# Altium PCB PCB1.PcbDoc
Units mm, origin at the board's own origin, x right, y up, seen from the top; angles counter-clockwise.
Board outline 50 x 50 mm, 2 copper layers (Top Layer, Bottom Layer); 7 components, 13 nets, 33 pads, 0 vias.
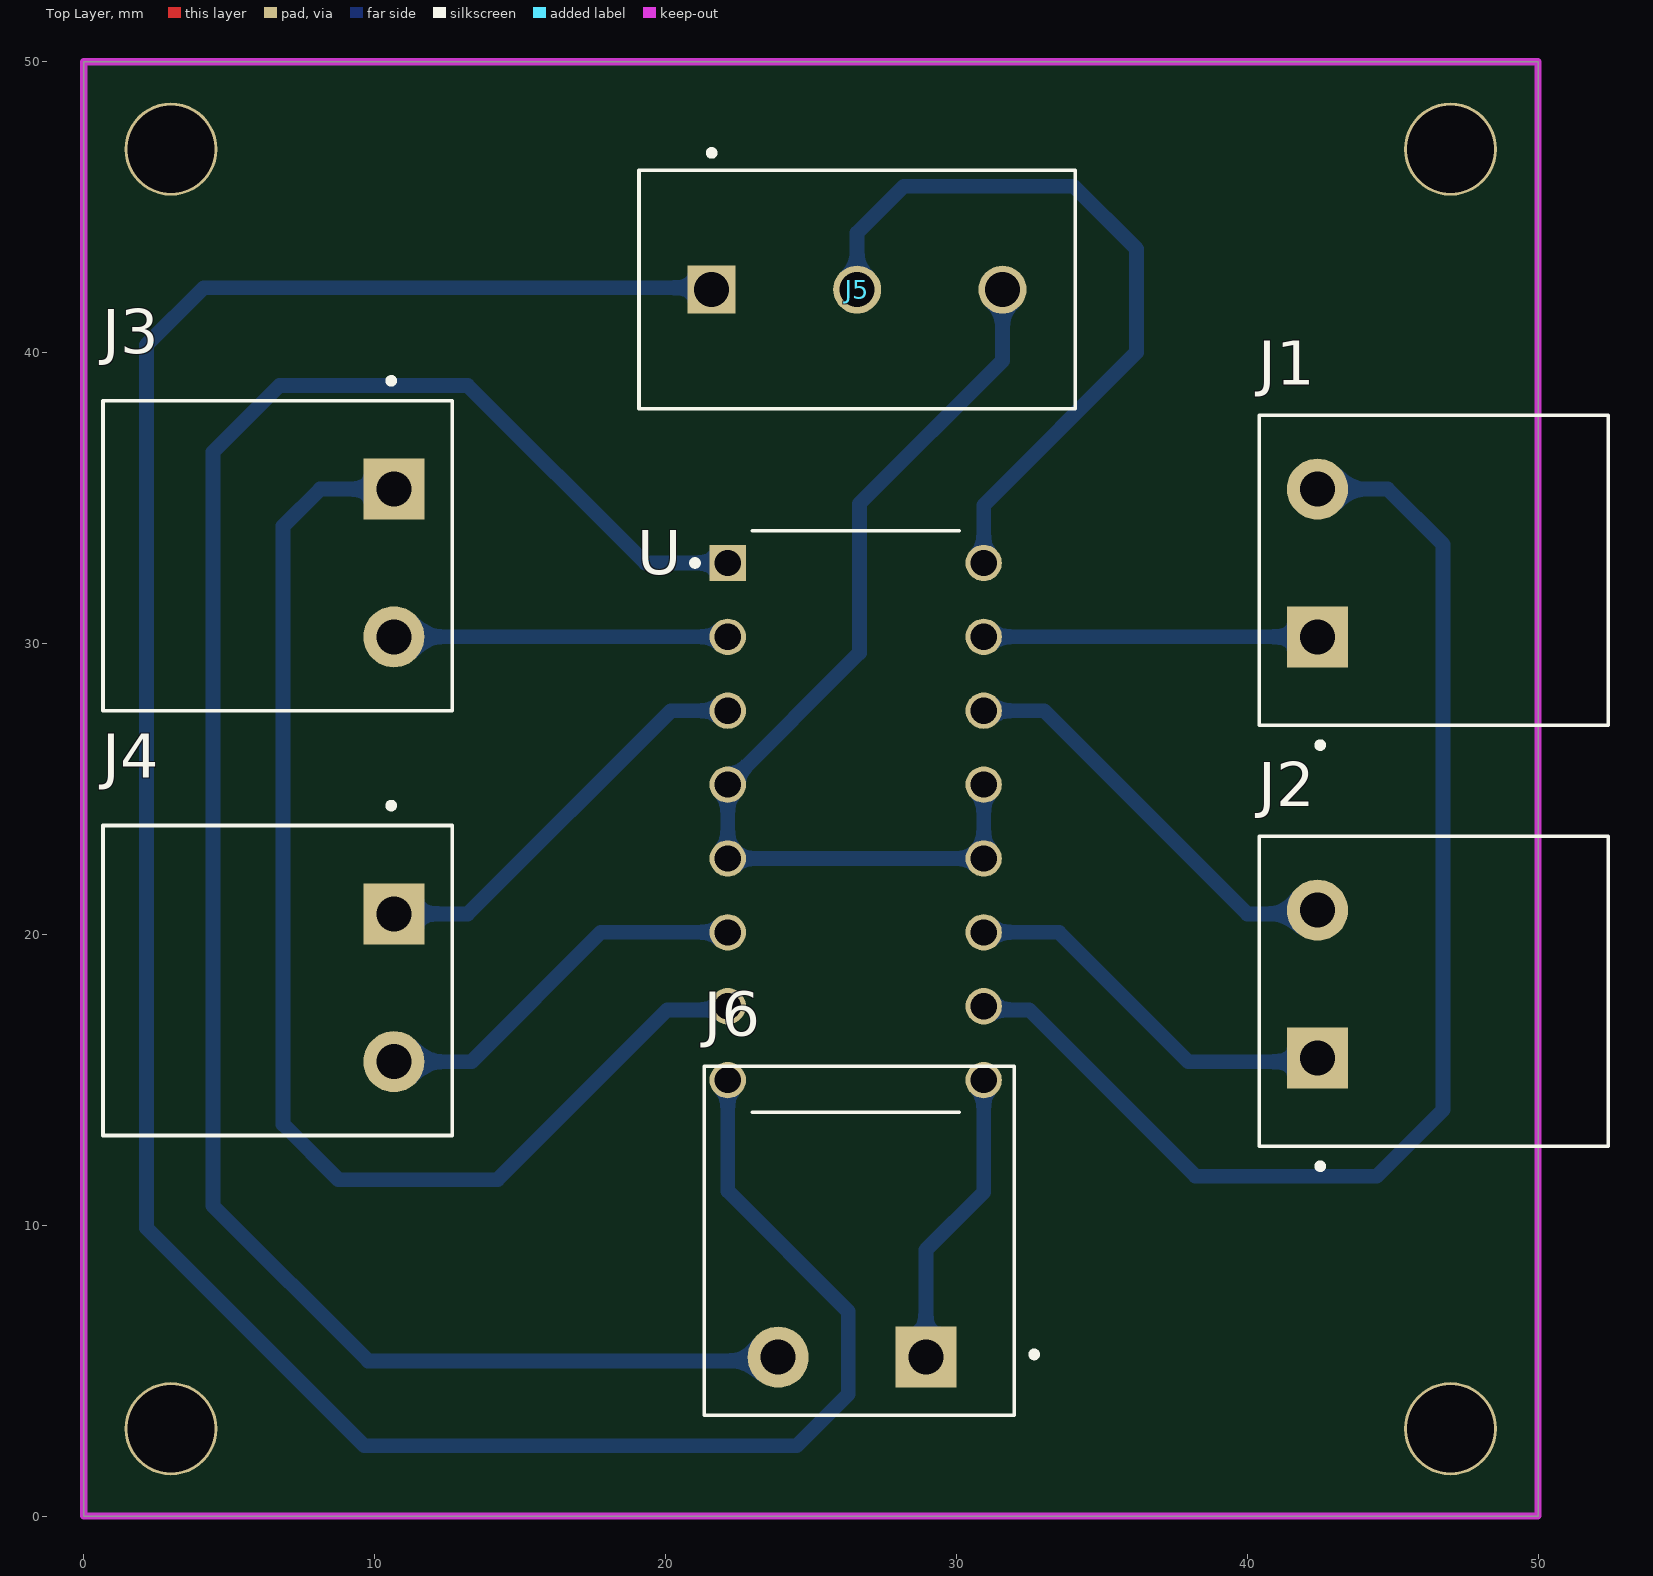
[diagram p0: Top Layer view]
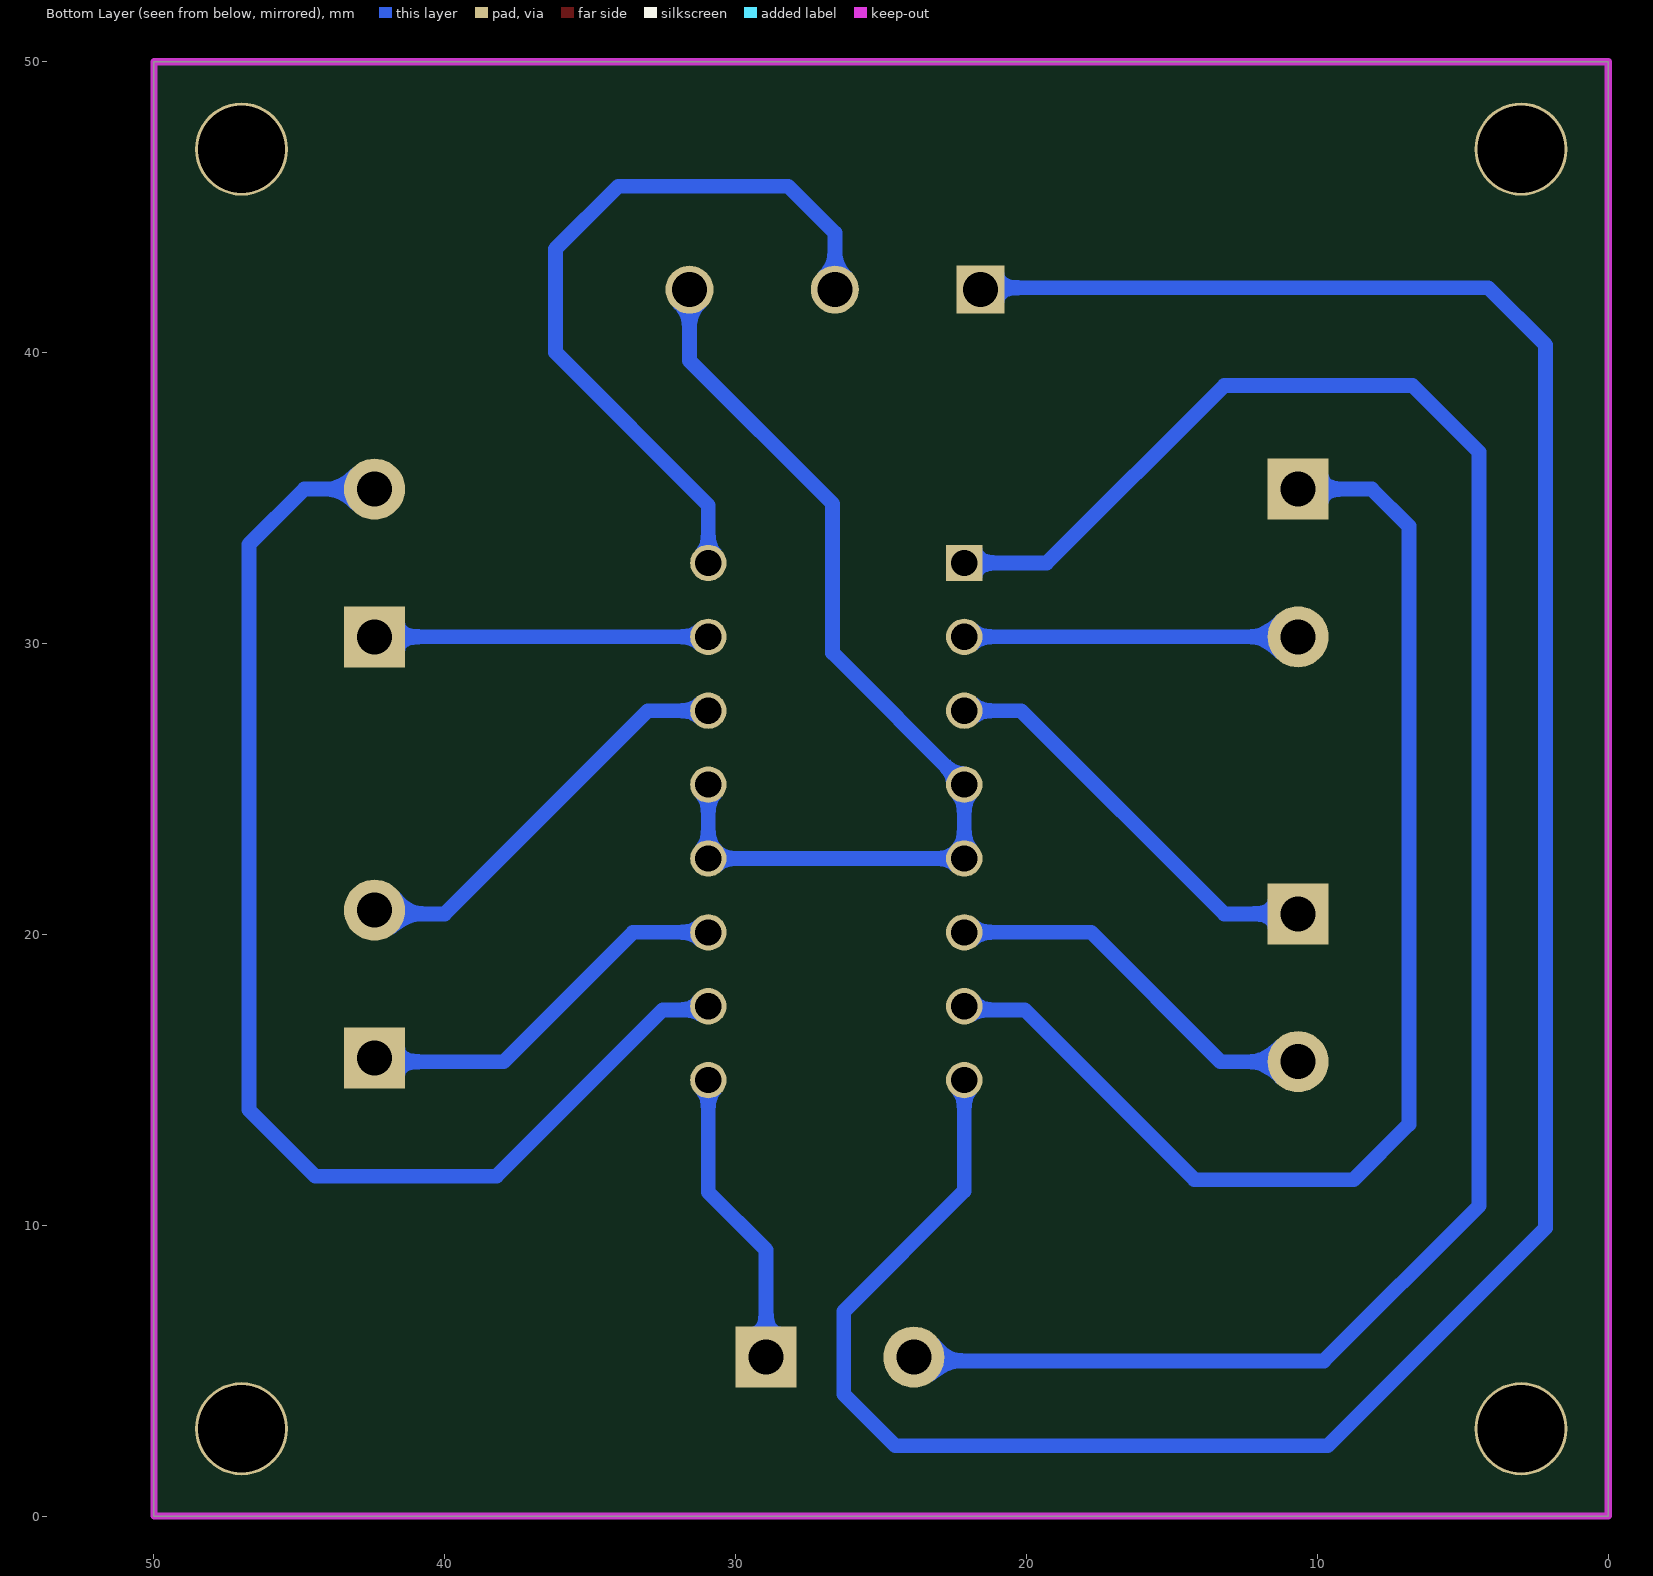
[diagram p1: Bottom Layer view, seen from below]

## Layer stack, top to bottom
Top Solder: solder mask 0.0102, Solder Resist, Dk 3.5
Top Layer: signal copper 0.0356
Dielectric 1: dielectric 0.32, FR-4, Dk 4.8
Bottom Layer: signal copper 0.0356
Bottom Solder: solder mask 0.0102, Solder Resist, Dk 3.5

## Board outline
0,0 0,50 50,50 50,0

## Design rules (kind name [scope] priority, off if disabled: settings)
Clearance [All] p1: gap=0.508 ignorepadtopadclearanceinfootprint=FALSE
HoleSize [All] p1: absolutevalues=TRUE maxlimit=2.54 minlimit=0.406 maxpercent=80.000 minpercent=20.000
HoleToHoleClearance [All] p1: gap=0.508 allowstackedmicrovias=TRUE
MinimumSolderMaskSliver [All] p1: minsoldermaskwidth=0.508
PolygonConnect [All] p1: connectstyle=Relief reliefconductorwidth=0.254 reliefentries=4 polygonreliefangle="90 Angle" airgapwidth=0.254
RoutingVias [All] p1: holewidth=0.711 width=1.524 viastyle="Through Hole" minholewidth=0.711 minwidth=1.524 maxholewidth=0.711 maxwidth=1.524
SilkToSilkClearance [All] p1: silktosilkclearance=0.508
SilkToSolderMaskClearance [IsPad] p1: minsilkscreentomaskgap=0.508 clearancetoexposedcopper=TRUE
SolderMaskExpansion [All] p1: expansion=0.102
Width [All] p1: maxlimit=0.508 minlimit=0.508 preferedwidth=0.508
25 further rules are at their usual default settings.

## Components (designator, comment, footprint, x,y, rotation, side; value= is the part's Value field where it differs from the comment)
J1 "282814-2" TE_282814-2 42.418,32.766 r90 top
J2 "282814-2" TE_282814-2 42.418,18.288 r90 top
J3 "282814-2" TE_282814-2 10.668,32.766 r270 top
J4 "282814-2" TE_282814-2 10.668,18.161 r270 top
J5 "1546216-3" TE_1546216-3 26.59,42.164 r0 top
J6 "282814-2" TE_282814-2 26.416,5.461 r180 top
U "L293D" DIP880W50P254L2000H510Q16 26.543,23.876 r0 top

## Footprints (in the part's own frame and the unit in brackets; to place one, negate y for a bottom-side part, rotate by r counter-clockwise, add the part's x,y. Pads: shape width x height; smd on the part's side, far side on the other; paste and mask are expansions set on the pad)
DIP880W50P254L2000H510Q16 [mm]
  rect 1.25x1.25 hole 0.9: 1(-4.4,8.89)
  round 1.25 hole 0.9: 2(-4.4,6.35) 3(-4.4,3.81) 4(-4.4,1.27) 5(-4.4,-1.27) 6(-4.4,-3.81) 7(-4.4,-6.35) 8(-4.4,-8.89) 9(4.4,-8.89) 10(4.4,-6.35) 11(4.4,-3.81) 12(4.4,-1.27) 13(4.4,1.27) 14(4.4,3.81) 15(4.4,6.35) 16(4.4,8.89)
  silkscreen extent -5.62,-10 3.55,10
TE_282814-2 [mm]
  rect 2.1x2.1 hole 1.2: 1(-2.54,0)
  round 2.1 hole 1.2: 2(2.54,0)
  silkscreen extent -6.36,-10 5.08,2
TE_1546216-3 [mm]
  rect 1.65x1.65 hole 1.2: 1(-5,0)
  round 1.65 hole 1.2: 2(0,0) 3(5,0)
  silkscreen extent -7.5,-4.1 7.5,4.8

## Part data
J1 J2 J3 J4 J6: "TERMINAL BLOCK,HEADER, 5.08 MM, 2WAY; Product Range:-; Gender:Header", Package=None, Availability=Unavailable, EU_RoHS_Compliance=Compliant, MF="TE Connectivity", MP=282814-2, Price=None, SnapEDA_Link=https://www.snapeda.com/parts/282814-2/TE%20Connectivity%20AMP%20Connectors/view-part/2381383/?ref=snap, TE_purchase_URL=https://www.te.com/usa-en/product-282814-2.html?te_bu=Cor&te_type=disp&te_campaign=seda_glo_cor-seda-global-disp-prtnr-fy19-seda-model-bom-cta_sma-317_1&elqCampaignId=32493
J5: "3 Position Wire to Board Terminal Block Horizontal with Board 0.197 _5.00mm_ Through Hole", Package=None, Availability=Unavailable, MF="TE Connectivity", MP=1546216-3, Price=None, SnapEDA_Link=https://www.snapeda.com/parts/1546216-3/TE%20Connectivity%20AMP%20Connectors/view-part/2881592/?ref=snap, TE_purchase_URL=https://www.te.com/usa-en/product-1546216-3.html?te_bu=Cor&te_type=disp&te_campaign=seda_glo_cor-seda-global-disp-prtnr-fy19-seda-model-bom-cta_sma-317_1&elqCampaignId=32493
U: "Bipolar Motor Driver Parallel 16-PowerDIP", Package="SOIC-20 STMicroelectronics", Availability=Unavailable, MF=STMicroelectronics, MP=L293D, Price=None, SnapEDA_Link=https://www.snapeda.com/parts/L293D/STMicroelectronics/view-part/83726/?ref=snap

## Free pads (board coordinates)
  round 3.2 hole 3: 2(3,46.99) 3(46.99,46.99) 4(3,3) 5(46.99,3)

## Nets (pads, with @x,y where several pads share a name; then routed paths per layer and width w, separated by ;. In a path a pad name is that pad's centre, name@x,y a point inside that pad or via, vN(x,y) a via of type N, cw(c..) or ccw(c..) an arc to the next point about the centre after c; other vN are vias at no path point)
"Net J4_1": J4.1 U.3 | length 14.2
  Bottom Layer w0.508: J4.1@10.795,20.701 13.208,20.701 20.193,27.686 U.3
"Net J4_2": J4.2 U.6 | length 13.2
  Bottom Layer w0.508: J4.2@10.795,15.621 13.335,15.621 17.78,20.066 U.6
NetJ1_1: J1.1 U.15 | length 11
  Bottom Layer w0.508: U.15 J1.1@41.91,30.226
NetJ1_2: J1.2 U.10 | length 44.2
  Bottom Layer w0.508: U.10 31.07,17.399 32.512,17.399 38.227,11.684 44.45,11.684 46.736,13.97 46.736,33.401 44.831,35.306 J1.2 J1.2@41.91,35.306
NetJ2_1: J2.1 U.11 | length 13.3
  Bottom Layer w0.508: U.11 33.528,20.066 37.973,15.621 J2.1@42.418,15.621
NetJ2_2: J2.2 U.14 | length 14.4
  Bottom Layer w0.508: U.14 33.02,27.686 40.005,20.701 J2.2@42.418,20.701
NetJ3_1: J3.1 U.7 | length 44
  Bottom Layer w0.508: J3.1@10.922,35.941 10.287,35.306 8.128,35.306 6.858,34.036 6.858,13.462 8.763,11.557 14.224,11.557 20.066,17.399 22.016,17.399 U.7
NetJ3_2: J3.2 U.2 | length 11.2
  Bottom Layer w0.508: J3.2@10.922,30.226 U.2
NetJ5_1: J5.1 U.8 | length 91.1
  Bottom Layer w0.508: J5.1 21.526,42.227 4.127,42.227 2.159,40.259 2.159,9.906 9.652,2.413 24.511,2.413 26.289,4.191 26.289,7.03 22.143,11.176 U.8
NetJ5_2: J5.2 U.16 | length 26.1
  Bottom Layer w0.508: J5.2 26.59,44.116 28.194,45.72 34.036,45.72 36.195,43.561 36.195,40.005 30.943,34.753 U.16
NetJ5_3: J5.3 U.4 U.5 U.12 U.13 | length 34.8
  Bottom Layer w0.508: U.13 U.12 U.5 U.4 26.67,29.673 26.67,34.798 31.59,39.718 J5.3
NetJ6_1: J6.1 U.9 | length 10.6
  Bottom Layer w0.508: J6.1@28.702,5.334 28.956,5.588 28.956,9.144 30.943,11.131 U.9
NetJ6_2: J6.2 U.1 | length 69.1
  Bottom Layer w0.508: U.1 19.304,32.766 13.208,38.862 6.731,38.862 4.445,36.576 4.445,10.668 9.779,5.334 J6.2@23.749,5.334 ; J6.2@23.495,5.08 J6.2@23.876,4.699

## Keep-outs
Keep-Out Layer:
  the board outline again, w0.254

## Silkscreen, mask and mechanical layers (free items; w line width, h text height)
Mechanical 1:
  lines w0.254: 0,40 0,0 40,0